# Altium PCB Co1n1oT.PcbDoc (part 2 of 3)
Units mil, origin at the board's own origin, x right, y up, seen from the top; angles counter-clockwise.
Board outline 3740.16 x 2559.06 mil, 4 copper layers (Top Layer, GroundPlane, PowerPlane, Bottom Layer), stack 58.4 mil thick; 129 components, 105 nets, 410 pads, 365 vias.
Unrouted connection lines stored in the file: 18.
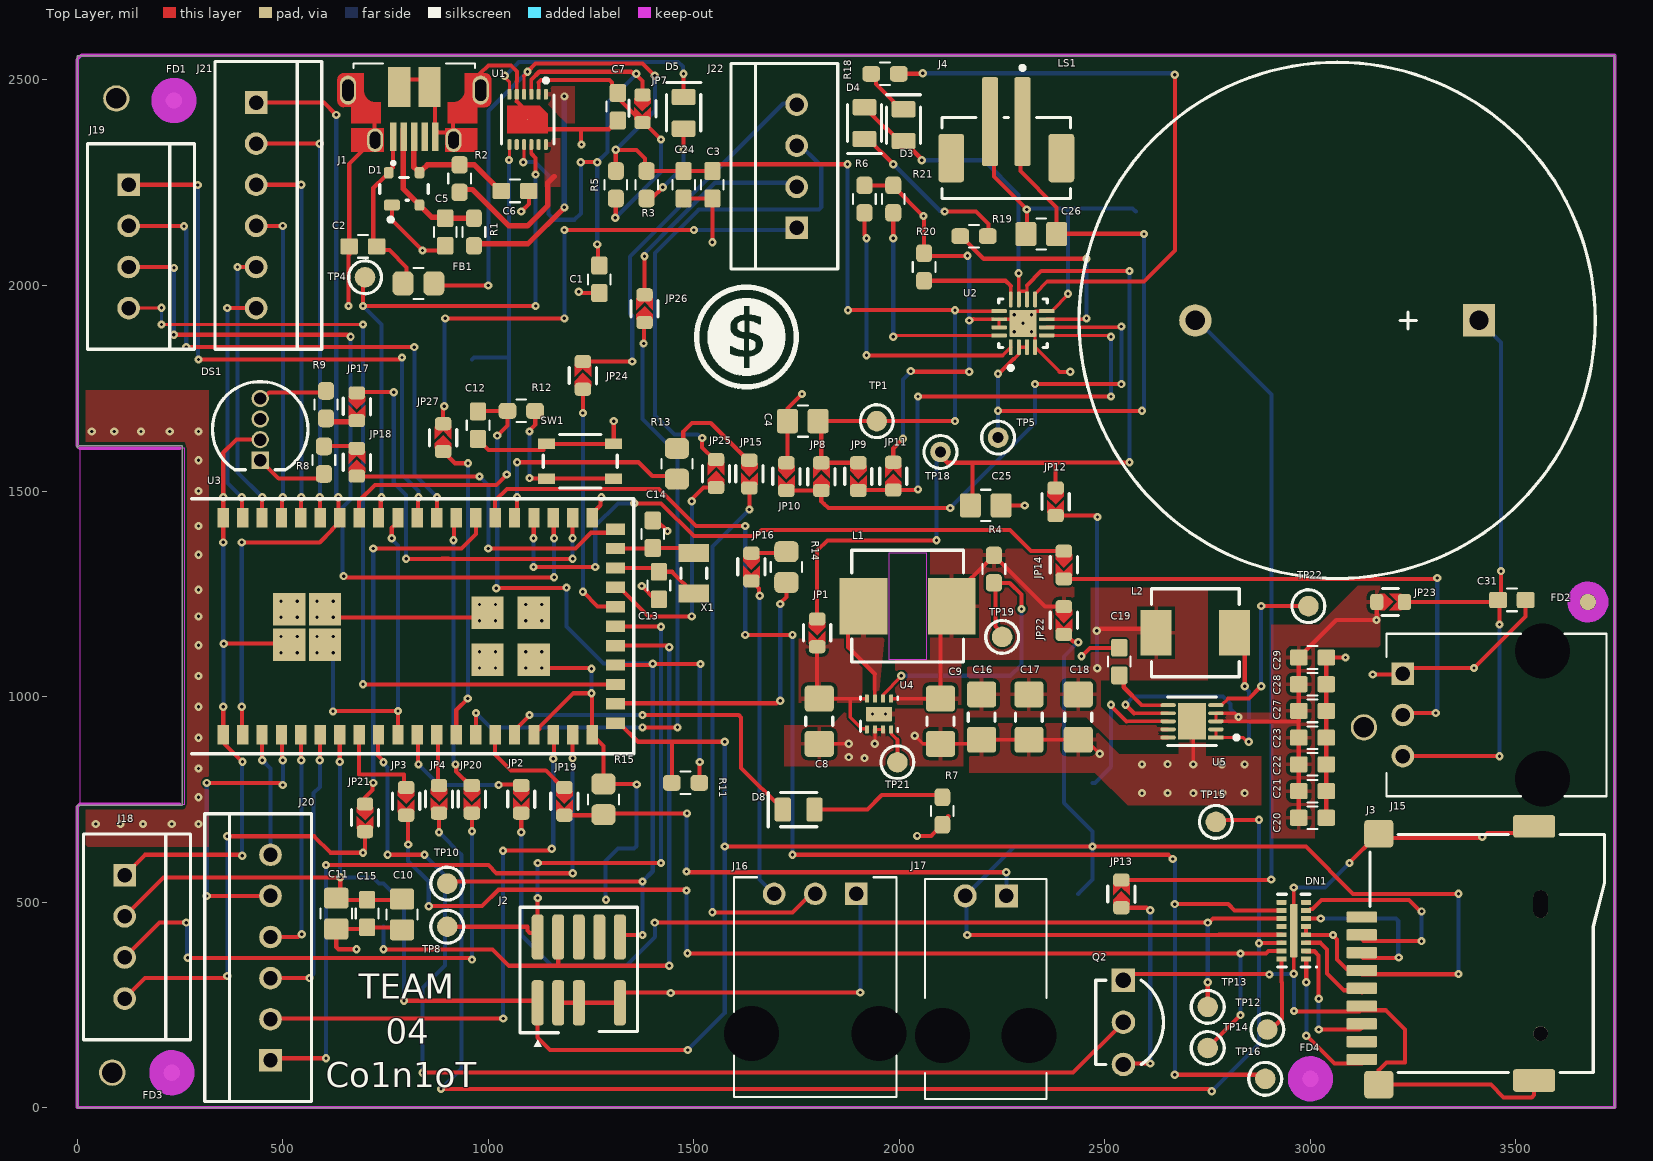
[diagram p0: Top Layer view]

## Via types
v1: diameter 20, hole 8, Top Layer to Bottom Layer, 350 vias
v2: diameter 19.68, hole 7.87, Top Layer to Bottom Layer, 13 vias
v3: diameter 20, hole 8, Top Layer to Bottom Layer, tented both sides, 2 vias

## Nets (pads, with @x,y where several pads share a name; then routed paths per layer and width w, separated by ;. In a path a pad name is that pad's centre, name@x,y a point inside that pad or via, vN(x,y) a via of type N, cw(c..) or ccw(c..) an arc to the next point about the centre after c; other vN are vias at no path point) (continued)
3V3: (continued)
  Top Layer w10: J18.2@115.28,465.28 210,560 v2@639.62,560 ; v1(638.46,841.54) U3.7@638.46,907.44 ; v2(639.62,560.38) 639.62,511.14 633.94,505.46 C15.2@705,505.46 776.06,505.46 C10.2@780,509.4 ; v1(795,260) 1115,260 J2.1@1120,255 1120,170 1150,140 v1(1485,140) ; U3.21@1309.38,934.85 1319.22,934.85 1364.07,890 1445,890 ; R11.2@1446.54,790 1446.54,888.46 1445,890 ; v1(1575,635) 2988.94,635 3103.94,520 v1(3360,520) ; v1(1575,890) 1445,890 ; v1(2043.11,661.03) 2077.39,661.03 R7.2@2104.43,688.07 2104.43,692.64 2118.93,707.14 2118.93,709.51 ; v1(2165,420) 2776.52,420 2777.15,420.63 DN1.13@2929.53,420.63 ; JP22.2@2400,1151.25 2405.62,1151.25 2422.76,1134.12 2432.98,1134.12 v1(2434.89,1132.2) ; DN1.5@2989.37,440.31 DN1.4@2989.37,420.63 2989.68,420.31 3054.68,420.31 v1(3055,420) 3055,419.14 3065,409.14 3065,359.88 3096.46,328.43 3120.08,328.43 3124.96,323.54 3125.69,324.27 3269.54,324.27 ; 3270.67,324.27 3359.27,324.27 v1(3360,325)
  Bottom Layer w10: v1(638.46,841.54) 639.23,840.77 639.23,560.77 v2(639.62,560.38) ; v2@640,560 719.14,560 721.49,557.65 734.18,545 TP6.1@745,545 795,495 v1(795,260) ; v1(1485,140) 1575,230 v1(1575,890) ; v1(2165,420) 2163.15,421.85 2163.15,512.13 J17.2@2160.12,515.16 2279.96,635 v1(2470,635) ; v1(2434.89,1132.2) 2400,1097.31 2400,741.54 2470,671.54 v1(2470,635) ; TP11.1@2435,520 2470,555 v1(2470,635) ; v1(3360,325) v1(3360,520)
5V: C31.2 J15.3 JP23.2 LS1.1 | length 1551.1
  Top Layer w10: J15.3@3224.84,855.12 3224.9,855.06 3459.94,855.06 v1(3460,855) ; JP23.2@3228.75,1230 3458.46,1230 C31.2@3460,1231.54 ; v1(3460,1175) C31.2@3460,1231.54 ; v1@3463.46,1304.88 v1(3463.67,1305.09) 3463.67,1235.21 C31.2@3460,1231.54
  Bottom Layer w10: LS1.1@3410.08,1915 3463.67,1861.4 v1(3463.67,1305.09) ; v1(3460,855) v1(3460,1175)
BQ_BAT_TS_6: R6.2 U2.1 | length 707.8
  Top Layer w8: 2250.94,1830 U2.1@2270.94,1850
  Top Layer w10: R6.2@1915,2176.54 1915,2122.71 1920,2117.71 v1(1920,2115) ; v1(1920,1830) 2250.94,1830
  Bottom Layer w10: v1(1920,1830) v1(1920,2115)
BQ_EN_1_6: JP8.1 JP10.2 U2.6 | length 1350
  Top Layer w8: U2.6@2358.76,1898.44 v1@2538.44,1898.44
  Top Layer w10: JP10.2@1725,1501.25 JP8.1@1810,1501.25 1810,1475 1815,1470 1815.86,1470 1827.53,1458.33 v1@2123.33,1458.33 ; v1(2330,1760) v1(2540,1760) ; v1@2538.44,1898.44 v1(2540,1900)
  Bottom Layer w10: v1(2123.47,1458.9) 2330,1665.43 v1(2330,1760) ; v1(2540,1760) v1(2540,1900)
BQ_EN_2_6: JP9.2 JP11.1 U2.5 | length 1145.9
  Top Layer w8: U2.5@2358.47,1878.47 v1@2508.91,1878.47
  Top Layer w10: JP9.2@1900,1501.25 1901.25,1502.5 JP11.1@1985,1502.5 2043.66,1502.5 v1(2045.12,1503.95) ; v1(2045,1730) v1(2515,1730) ; v1@2508.91,1878.47 2512.38,1875 v1(2515,1875)
  Bottom Layer w10: v1(2045,1730) 2043.85,1728.85 2043.85,1507.51 v1(2045.12,1503.95) ; v1(2515,1730) v1(2515,1875)